# Altium PCB TrackBalloptics.PcbDoc
Units mm, origin at the board's own origin, x right, y up, seen from the top; angles counter-clockwise.
Board outline 19.75 x 14.75 mm, 2 copper layers (Top Layer, Bottom Layer), stack 1.671 mm thick; 6 components, 8 nets, 27 pads, 8 vias.
Unrouted connection lines stored in the file: 7.
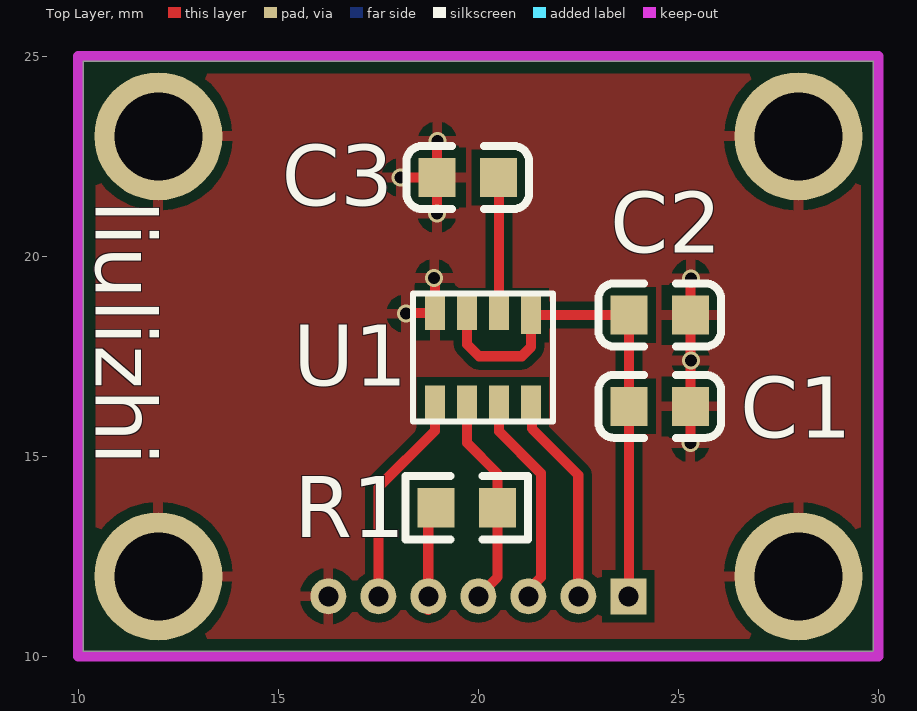
[diagram p0: Top Layer view]
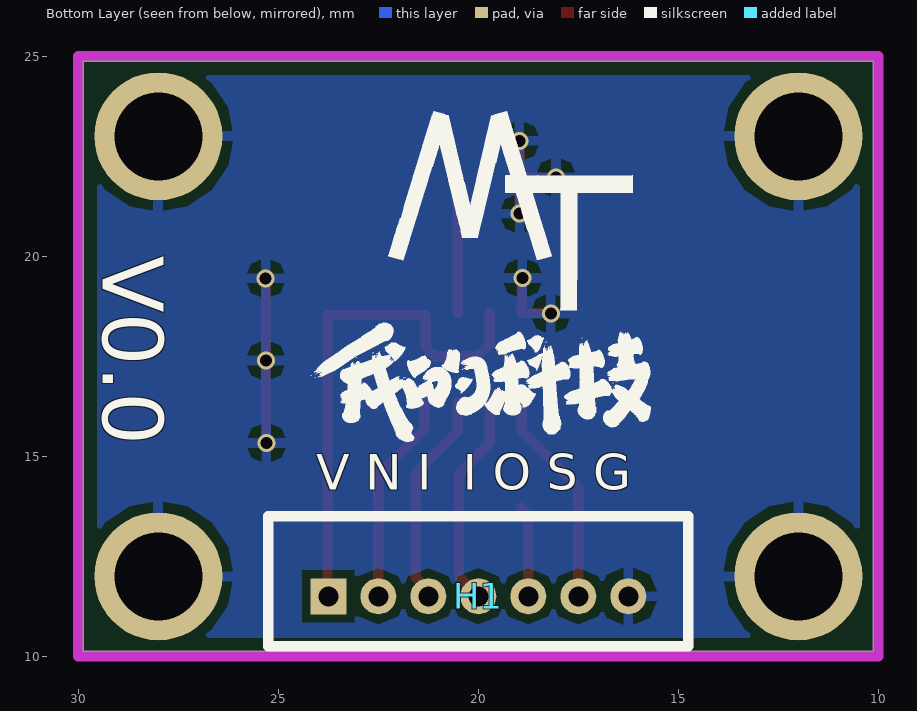
[diagram p1: Bottom Layer view, seen from below]
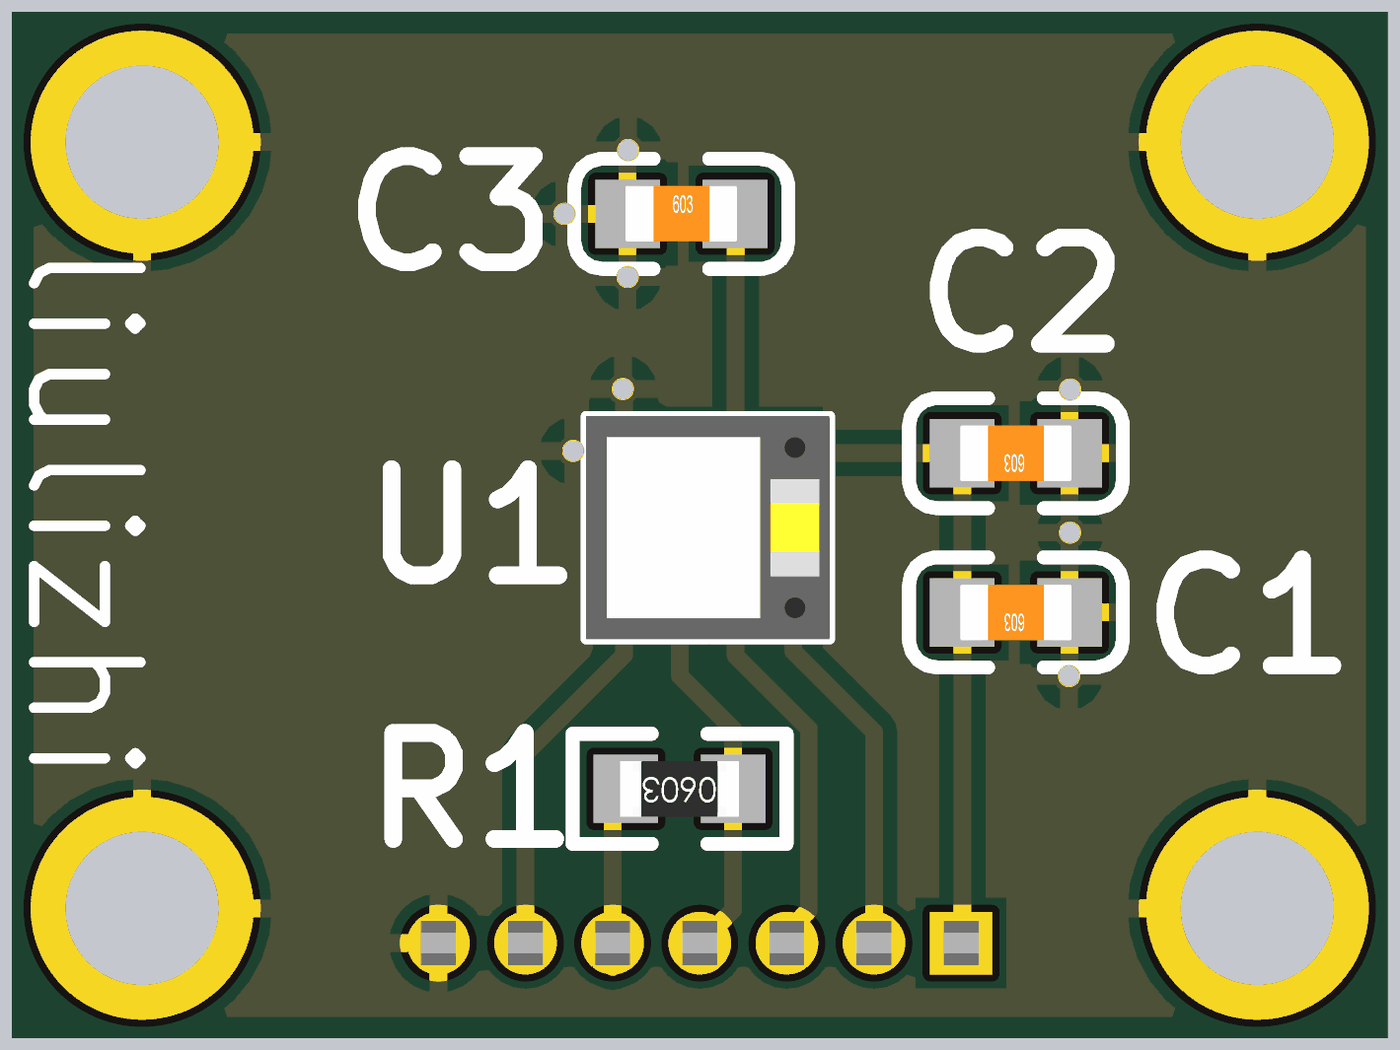
[diagram p2: 3D render of the assembled board from above, using the file's embedded part models]

## Layer stack, top to bottom
Top Solder: solder mask 0.0102, Solder Resist, Dk 3.5
Top Layer: signal copper 0.0356
Dielectric 1: dielectric 1.6, FR-4, Dk 4.8
Bottom Layer: signal copper 0.0356
Bottom Solder: solder mask 0.0102, Solder Resist, Dk 3.5

## Board outline
10.127,10.127 29.873,10.127 29.873,24.873 10.127,24.873

## Design rules (kind name [scope] priority, off if disabled: settings)
Clearance Clearance_polygon [OnLayer('Keep-Out Layer') vs InPolygon] p1: gap=0.305 ignorepadtopadclearanceinfootprint=FALSE
Clearance [All] p2: gap=0.2 ignorepadtopadclearanceinfootprint=FALSE
HoleSize [All] p1: absolutevalues=TRUE maxlimit=6 minlimit=0.025 maxpercent=80.000 minpercent=20.000
PolygonConnect [All] p1: connectstyle=Relief reliefconductorwidth=0.254 reliefentries=4 polygonreliefangle="90 Angle" airgapwidth=0.254
RoutingVias [All] p1: holewidth=0.3 width=0.45 viastyle="Through Hole" minholewidth=0.3 minwidth=0.45 maxholewidth=5 maxwidth=5
SilkToSilkClearance [All] p1: silktosilkclearance=0
SolderMaskExpansion [All] p1: expansion=0.102 istentingtop=FALSE
Width [All] p1: maxlimit=0.508 minlimit=0.254 preferedwidth=0.254
28 further rules are at their usual default settings.

## Components (designator, comment, footprint, x,y, rotation, side; value= is the part's Value field where it differs from the comment)
C1 "0.1uF" 0603 24.537,16.249 r180 top
C2 "10uF" 0603 24.537,18.535 r180 top
C3 "4.7uF" 0603 19.736,21.971 r0 top
H1 "SH1.25mm_7P" SH1.25MM_7P 16.25,11.5 r0 bottom
R1 "3.3K" R_0603 19.71,13.716 r180 top
U1 "Optical Tracking Miniature Chip" PAT9125EL 20.116,17.465 r270 top

## Footprints (in the part's own frame and the unit in brackets; to place one, negate y for a bottom-side part, rotate by r counter-clockwise, add the part's x,y. Pads: shape width x height; smd on the part's side, far side on the other; paste and mask are expansions set on the pad)
0603 [mm]
  rect 0.93x0.98 smd: 1(-0.77,0) 2(0.77,0)
  silkscreen extent -1.53,-0.79 1.54,0.79, body extent -0.8,-0.4 0.8,0.4, height 0.3
PAT9125EL [mm]
  rect 0.95x0.5 smd: 1(-1.065,1.2)
  rect 0.85x0.5 smd: 2(-1.115,0.4) 3(-1.115,-0.4) 4(-1.115,-1.2) 5(1.115,-1.2) 6(1.115,-0.4) 7(1.115,0.4) 8(1.115,1.2)
  silkscreen extent -1.6,-1.75 1.6,1.75, body extent -1.6,-1.75 1.6,1.75, height 1
R_0603 [mm]
  rect 0.93x0.98 smd: 1(-0.77,0) 2(0.77,0)
  silkscreen extent -1.53,-0.79 1.54,0.79, body extent -0.85,-0.4 0.85,0.4, height 0.56
SH1.25MM_7P [mm]
  rect 0.9x0.9 hole 0.5: 1(7.5,0)
  round 0.9 hole 0.5: 2(6.25,0) 3(5,0) 4(3.75,0) 5(2.5,0) 6(1.25,0) 7(0,0)
  silkscreen extent -1.5,-2 9,1.25, body extent -1.5,-1.95 9,1.25, height 4.7

## Part data
C1 C2 C3: library part CAP_0603, "贴片电容 0603"
R1: library part RES_0603, "电阻 0603"
U1: library part PAT9125EL

## Free pads (board coordinates)
  round 3.2 hole 2.2: 0(12,12) 0(12,23) 0(28,23) 0(28,12)

## Via types
v1: diameter 0.45, hole 0.3, Top Layer to Bottom Layer, tented both sides, 8 vias

## Nets (pads, with @x,y where several pads share a name; then routed paths per layer and width w, separated by ;. In a path a pad name is that pad's centre, name@x,y a point inside that pad or via, vN(x,y) a via of type N, cw(c..) or ccw(c..) an arc to the next point about the centre after c; other vN are vias at no path point)
3V3: C1.2 C2.2 H1.1 U1.1 U1.3 | length 12.9
  Top Layer w0.254: U1.3 19.716,17.8 20.015,17.501 21.084,17.501 21.321,17.738 21.321,18.535 C2.2 H1.1@23.767,11.517
GND: C1.1 C2.1 C3.1 H1.7 pad.0 U1.4 | length 8.5
  Top Layer w0.254: v1(18.059,21.971) C3.1 ; v1(18.186,18.567) 18.199,18.58 U1.4 18.916,19.438 v1(18.898,19.456) ; v1(18.966,21.065) C3.1 ; v1(18.974,22.885) 18.966,22.877 C3.1 ; v1(25.299,15.334) 25.307,15.342 C1.1 25.307,17.389 v1(25.312,17.394) 25.307,17.4 C2.1 25.307,19.441 v1(25.315,19.449)
INT: H1.3 U1.7 | length 5.4
  Top Layer w0.254: U1.7 20.516,15.628 21.565,14.58 21.565,11.972 21.25,11.657 H1.3
MISO: H1.4 R1.1 U1.6 | length 5.4
  Top Layer w0.254: U1.6 19.716,15.336 20.48,14.572 R1.1 20.48,11.98 H1.4@19.951,11.451
MOSI: H1.5 R1.2 | length 2.6
  Top Layer w0.254: H1.5@18.75,11.158 18.75,13.526 R1.2
NCS: H1.2 U1.8 | length 5.3
  Top Layer w0.254: U1.8 21.34,16.326 21.34,15.693 22.5,14.533 H1.2
NetC3_2: C3.2 U1.2 | length 3.4
  Top Layer w0.254: U1.2 C3.2@20.516,21.971
SCLK: H1.6 U1.5 | length 5.4
  Top Layer w0.254: H1.6 17.501,14.224 18.916,15.64 U1.5

## Polygon pours and split planes (outlines as drawn)
GND on Top Layer "GND_L01_P001" (solid, remove dead copper, pour order 1): 12,10 cw(c12,12) 10,12 10,23 cw(c12,23) 12,25 28,25 cw(c28,23) 30,23 30,12 cw(c28,12) 28,10
GND on Bottom Layer "GND_L02_P000" (solid, remove dead copper, pour order 0): 12,10 cw(c12,12) 10,12 10,23 cw(c12,23) 12,25 28,25 cw(c28,23) 30,23 30,12 cw(c28,12) 28,10

## Keep-outs
Keep-Out Layer:
  lines w0.254: 10,10 10,25 30,25 30,10 10,10

## Silkscreen, mask and mechanical layers (free items; w line width, h text height)
Top Overlay:
  text "liulizhi" at 10.44,21.404 h1.52 r270
Bottom Overlay:
  drawing of 3044 lines, arcs and shapes, not listed
  text "V0.0" at 29.388,20.015 h1.52 r90
  text "V N I  I O S G" at 24.055,13.863 h1.52
Mechanical 1:
  lines w0.254: 10,10 30,10 30,25 10,25 10,10